# EAGLE board MKRConnectorCarrier_V3.0 (EAGLE 9.1.3)
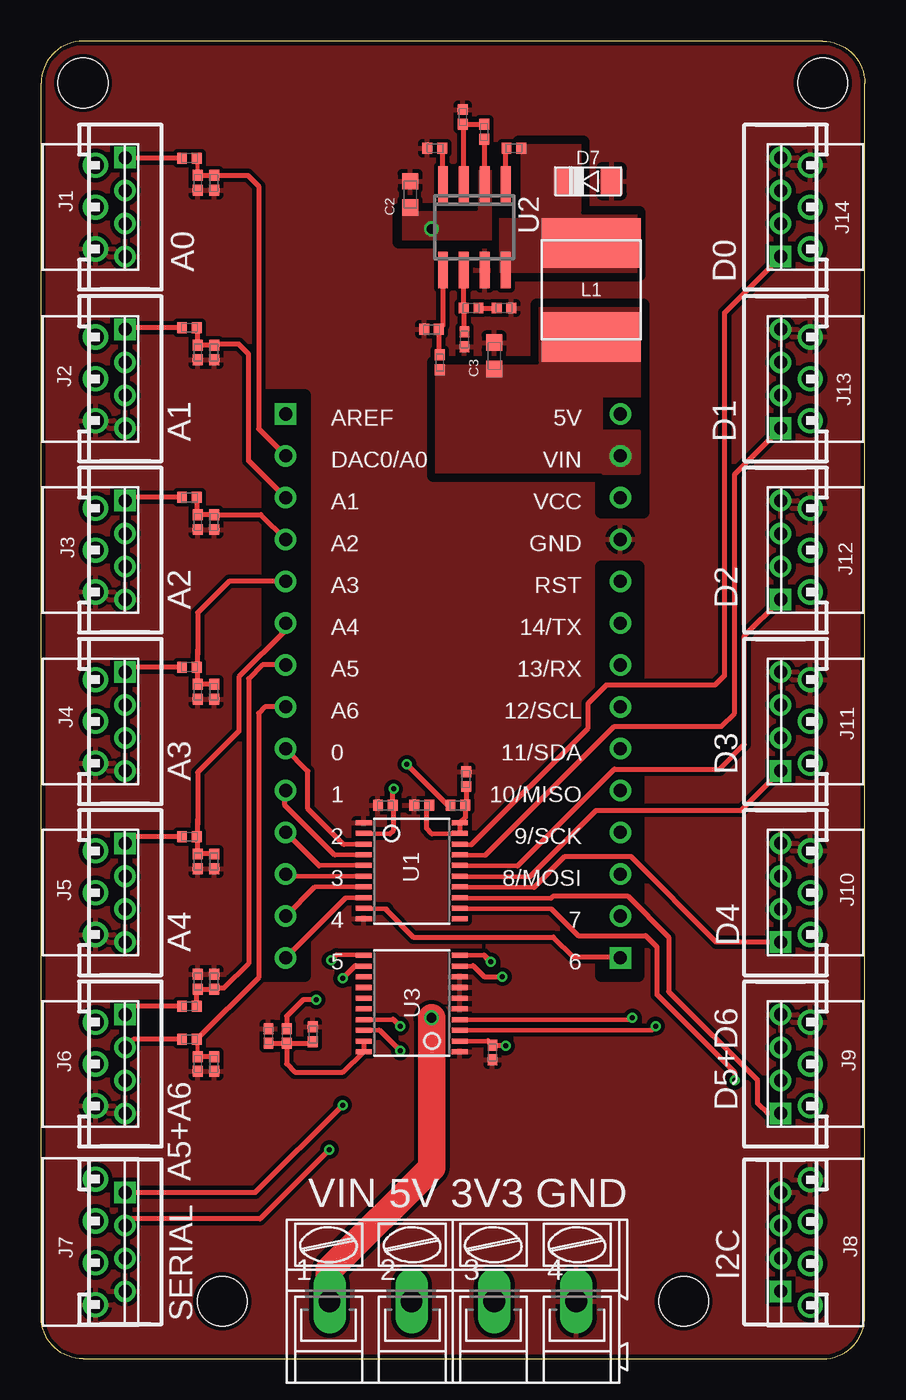
[diagram p0: board, top side]
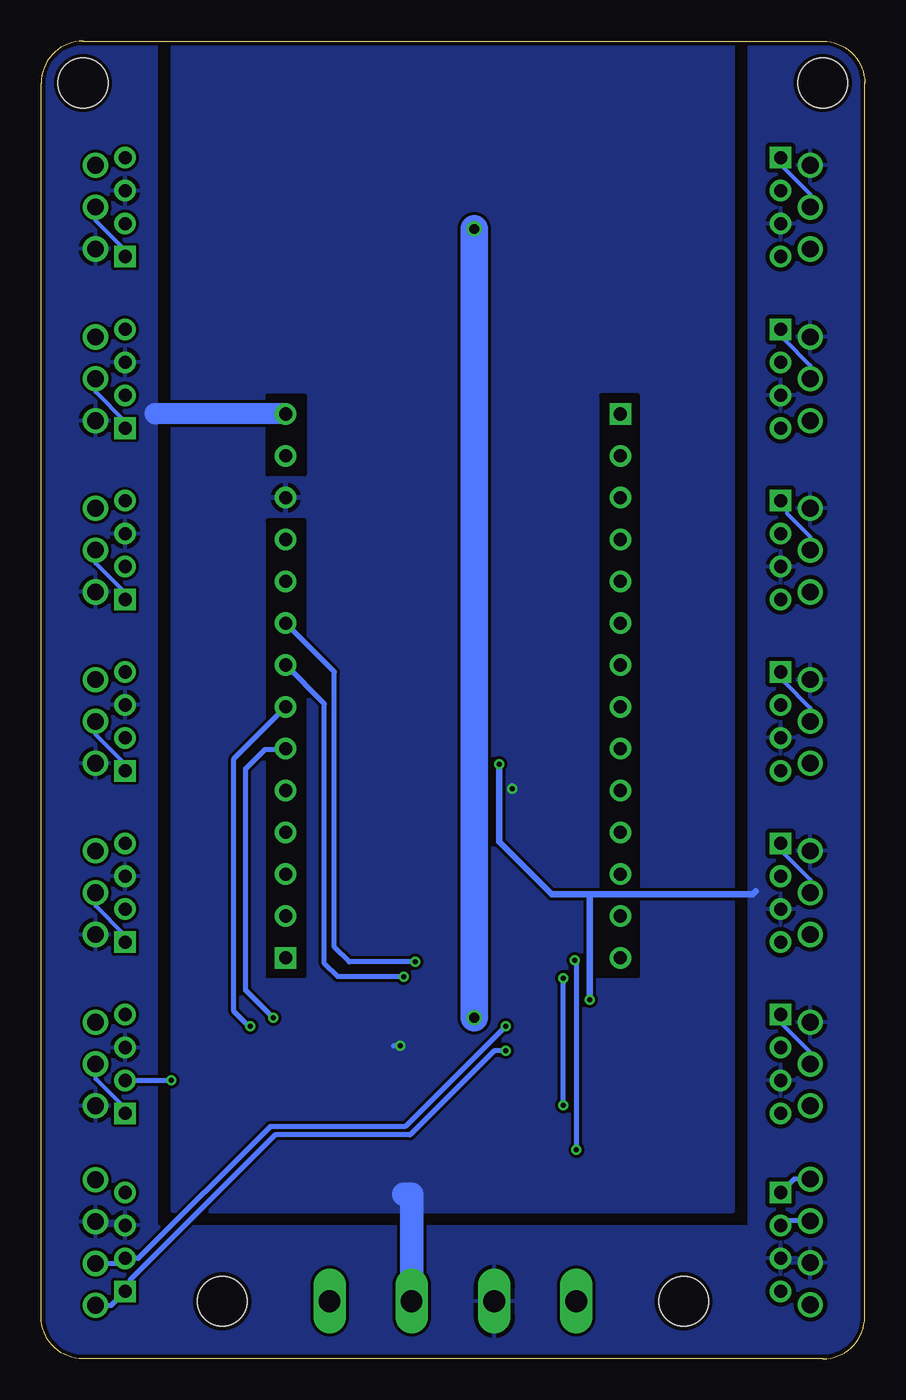
[diagram p1: board, bottom side, seen from below]

Size 50 x 80 mm. Coordinates in mm from the lower left corner, seen from the top.
Outline: 2.54,0 47.46,0 arc90 50,2.54 50,77.46 arc90 47.46,80 2.54,80 arc90 0,77.46 0,2.54 arc90 2.54,0
Copper layers (1*16): Top 0.035mm / dielectric 1.5mm / Bottom 0.035mm
Design rules "SeeedStudio_2layers *": minimum track width 6mil, minimum drill 12mil, track to track 7mil, track to pad 7mil, pad to pad 7mil, via to via 7mil, smd to smd 0mil, copper to edge 10mil, drill to drill 10mil, minimum pad ring 10mil, minimum via ring 6mil, stop-mask expansion 2mil, vias tented up to drill 100mil, thermal gap 10mil
Holes 3 mm at 47.46,77.46 2.54,77.46 11,3.5 39,3.5
tRestrict: 30 lines
bRestrict: 12 lines

## Footprints (pad centres in the part's own frame; a part is rotated, then mirrored left to right if it is on the bottom)
MODULINO-3SM = drill 1.016: 1 2.54,0; 2 0,0; 3 -2.54,0
MKRBOARD-NOOUTLINE = drill 0.8: 0 42.455,2.34; 1 44.995,2.34; 2 47.535,2.34; 3 50.075,2.34; 4 52.615,2.34; 5 55.155,2.34; 5V 22.135,22.66; 7 52.615,22.66; 8 50.075,22.66; 9 47.535,22.66; 10 44.995,22.66; 11 42.455,22.66; 12 39.915,22.66; 13 37.375,22.66; 14 34.835,22.66; A0 24.675,2.34; A1 27.215,2.34; A2 29.755,2.34; A3 32.295,2.34; A4 34.835,2.34; A5 37.375,2.34; A6 39.915,2.34; GND 29.755,22.66; RST 32.295,22.66; VCC 27.215,22.66; VIN 24.675,22.66 | drill 0.8 square: 6 55.155,22.66; AREF 22.135,2.34
0402-1005X55N = smd 0.62 x 0.62: 1 -0.45,0; 2 0.45,0
0603-1608X90N = smd 0.95 x 1: 1 -0.8,0; 2 0.8,0
SOD123F = smd 1.8 x 1.34: A 0,-1.43; C 0,1.43
MODULINO-4SM = drill 1.016: 1 5.08,0; 2 2.54,0; 3 0,0; 4 -2.54,0
HW4-2.0 = drill 0.8 pad 1.27 square: 1 -3,0 | drill 0.8 pad 1.27: 2 -1,0; 3 1,0; 4 3,0
SRN6045 = smd 3 x 6: 1 -2.85,0; 2 2.85,0
AK300/4 = drill 1.321 long: 1 -7.493,0; 2 -2.515,0; 3 2.515,0; 4 7.493,0
TSSOP20 = smd 0.305 x 0.991: 1 -2.955,-2.918; 2 -2.305,-2.918; 3 -1.655,-2.918; 4 -1.005,-2.918; 5 -0.355,-2.918; 6 0.295,-2.918; 7 0.945,-2.918; 8 1.595,-2.918; 9 2.245,-2.918; 10 2.895,-2.918; 11 2.895,2.918; 12 2.245,2.918; 13 1.595,2.918; 14 0.945,2.918; 15 0.295,2.918; 16 -0.355,2.918; 17 -1.005,2.918; 18 -1.655,2.918; 19 -2.305,2.918; 20 -2.955,2.918
SO08 = smd 0.6 x 2.2: 1 -1.905,-2.6; 2 -0.635,-2.6; 3 0.635,-2.6; 4 1.905,-2.6; 5 1.905,2.6; 6 0.635,2.6; 7 -0.635,2.6; 8 -1.905,2.6

## Placement (x,y rotation side)
A0  DNP  [MODULINO-3SM]  3.3,69.92 90 top
A1  DNP  [MODULINO-3SM]  3.3,59.5 90 top
A2  DNP  [MODULINO-3SM]  3.3,49.1 90 top
A3  DNP  [MODULINO-3SM]  3.3,38.7 90 top
A4  DNP  [MODULINO-3SM]  3.3,28.3 90 top
A5  DNP  [MODULINO-3SM]  3.3,17.9 90 top
B1  DNP  [MKRBOARD-NOOUTLINE]  12.5,79.5 270 top
C1  100n  [0402-1005X55N]  28.7,73.5 0 top
C2  10u  [0603-1608X90N]  22.4,70.7 90 top
C3  10u  [0603-1608X90N]  27.5,60.9 90 top
C4  8n2  [0402-1005X55N]  23.9,73.5 180 top
C5  4n7  [0402-1005X55N]  28.1,63.8 0 top
C6  110p  [0402-1005X55N]  25.7,61.9 270 top
C7  100n  [0402-1005X55N]  20.9,33.6 0 top
C8  DNP  [0402-1005X55N]  23.1,33.6 180 top
C9  100n  [0402-1005X55N]  25.8,35.2 270 top
C10  100n  [0402-1005X55N]  10.5,71.4 270 top
C11  100n  [0402-1005X55N]  10.5,61.1 270 top
C12  100n  [0402-1005X55N]  10.5,50.8 270 top
C13  100n  [0402-1005X55N]  10.5,40.5 270 top
C14  100n  [0402-1005X55N]  10.5,30.2 270 top
C15  100n  [0402-1005X55N]  10.5,22.9 90 top
C16  100n  [0402-1005X55N]  10.5,17.9 270 top
C17  100n  [0402-1005X55N]  27.4,18.6 90 top
C18  DNP  [0402-1005X55N]  16.5,19.7 90 top
C19  100n  [0402-1005X55N]  13.8,19.6 270 top
D0  DNP  [MODULINO-3SM]  46.7,69.92 270 top
D1  DNP  [MODULINO-3SM]  46.7,59.5 270 top
D2  DNP  [MODULINO-3SM]  46.7,49.1 270 top
D3  DNP  [MODULINO-3SM]  46.7,38.7 270 top
D4  DNP  [MODULINO-3SM]  46.7,28.3 270 top
D5  DNP  [MODULINO-3SM]  46.7,17.9 270 top
D7  SS24FL  [SOD123F]  33.2,71.5 90 top
FRAME1  DNP  [FRAME]  -0.6,-7.6 0 top  (outside the outline)
I2C  DNP  [MODULINO-4SM]  46.7,8.33 270 top
J1  -  [HW4-2.0]  5.1,69.92 270 top
J2  -  [HW4-2.0]  5.1,59.5 270 top
J3  -  [HW4-2.0]  5.1,49.1 270 top
J4  -  [HW4-2.0]  5.1,38.7 270 top
J5  -  [HW4-2.0]  5.1,28.3 270 top
J6  -  [HW4-2.0]  5.1,17.9 270 top
J7  -  [HW4-2.0]  5.1,7.1 270 top
J8  -  [HW4-2.0]  44.9,7.1 90 top
J9  -  [HW4-2.0]  44.9,17.9 90 top
J10  -  [HW4-2.0]  44.9,28.3 90 top
J11  -  [HW4-2.0]  44.9,38.7 90 top
J12  -  [HW4-2.0]  44.9,49.1 90 top
J13  -  [HW4-2.0]  44.9,59.5 90 top
J14  -  [HW4-2.0]  44.9,69.92 90 top
L1  15uH  [SRN6045]  33.4,64.9 270 top
R1  DNP  [0402-1005X55N]  25.6,75.4 270 top
R2  DNP  [0402-1005X55N]  26.9,74.5 90 top
R3  10k2  [0402-1005X55N]  24.2,60.5 270 top
R4  1k91  [0402-1005X55N]  23.7,62.5 0 top
R5  12k7  [0402-1005X55N]  26.1,63.8 180 top
R6  100k  [0402-1005X55N]  25.3,33.6 180 top
R7  470k  [0402-1005X55N]  9,72.9 0 top
R8  910k  [0402-1005X55N]  9.5,71.4 90 top
R9  470k  [0402-1005X55N]  9,62.6 0 top
R10  910k  [0402-1005X55N]  9.5,61.1 90 top
R11  470k  [0402-1005X55N]  9,52.3 0 top
R12  910k  [0402-1005X55N]  9.5,50.8 90 top
R13  470k  [0402-1005X55N]  9,42 0 top
R14  910k  [0402-1005X55N]  9.5,40.5 90 top
R15  470k  [0402-1005X55N]  9,31.7 0 top
R16  910k  [0402-1005X55N]  9.5,30.2 90 top
R17  470k  [0402-1005X55N]  9,21.4 0 top
R18  910k  [0402-1005X55N]  9.5,22.9 270 top
R19  470k  [0402-1005X55N]  9,19.4 0 top
R20  910k  [0402-1005X55N]  9.5,17.9 90 top
R21  100k  [0402-1005X55N]  14.9,19.6 90 top
SERIAL  DNP  [MODULINO-4SM]  3.3,5.83 90 top
SUPPLY  -  [AK300/4]  25,3.5 0 top
U1  LSF0108  [TSSOP20]  22.5,29.6 270 top
U2  TPS54232DR  [SO08]  26.3,68.7 180 top
U3  LSF0108  [TSSOP20]  22.5,21.6 90 top

## Library data of the parts
A0 A1-A5 D0 D1-D5 I2C SERIAL = Arduino-connectors; DATASHEET: DNP; DISTRIBUTOR-LINK: DNP; DISTRIBUTOR-PN: DNP; MANUFACTURER: DNP; MANUFACTURER-PN: DNP
B1 FRAME1 = Arduino-utility; CODE-ARDUINO: DNP; DATASHEET: DNP; DISTRIBUTOR-LINK: DNP; DISTRIBUTOR-PN: DNP; MANUFACTURER: DNP; MANUFACTURER-PN: DNP
C1 C7 C9-C17 C19 = Arduino-rcl; CODE-ARDUINO: 0132; DATASHEET: http://www.tdk.com/pdf/TDKMLCCCapRange.pdf; DISTRIBUTOR-LINK: http://www.digikey.com/product-detail/en/tdk-corporation/C1005X5R1H104K050BB/445-5942-1-ND/2443982; DISTRIBUTOR-PN: 445-5942-1-ND; MANUFACTURER: TDK; MANUFACTURER-PN: C1005X5R1H104K050BB
C2 C3 = Arduino-rcl; CODE-ARDUINO: 2213; DATASHEET: http://www.murata.com/~/media/webrenewal/support/library/catalog/products/capacitor/mlcc/c02e.pdf; DISTRIBUTOR-LINK: http://www.digikey.com/product-search/en?keywords=490-10728-1-ND; DISTRIBUTOR-PN: 490-10728-1-ND; MANUFACTURER: Murata; MANUFACTURER-PN: GRM188R61C106KAALD
C4 = Arduino-rcl; CODE-ARDUINO: 2263; DATASHEET: http://www.yageo.com/documents/recent/UPY-GPHC_X7R_6.3V-to-50V_18.pdf; DISTRIBUTOR-LINK: https://www.digikey.com/product-detail/en/yageo/CC0402KRX7R7BB822/311-1041-1-ND/302958; DISTRIBUTOR-PN: 311-1041-1-ND; MANUFACTURER: Yageo; MANUFACTURER-PN: CC0402KRX7R7BB822
C5 = Arduino-rcl; CODE-ARDUINO: 2266; DATASHEET: http://search.murata.co.jp/Ceramy/image/img/A01X/partnumbering_e_01.pdf; DISTRIBUTOR-LINK: https://www.digikey.com/product-detail/en/murata-electronics-north-america/GRM155R71H472KA01J/490-8259-1-ND/4380553; DISTRIBUTOR-PN: 490-8259-1-ND; MANUFACTURER: Murata; MANUFACTURER-PN: GRM155R71H472KA01J
C6 = Arduino-rcl; CODE-ARDUINO: 2264; DATASHEET: http://search.murata.co.jp/Ceramy/image/img/A01X/G101/ENG/GRM1555C1H111GA01-01.pdf; DISTRIBUTOR-LINK: https://www.digikey.com/product-detail/en/murata-electronics-north-america/GRM1555C1H111GA01D/490-6195-1-ND/3845392; DISTRIBUTOR-PN: 490-6195-1-ND; MANUFACTURER: Murata; MANUFACTURER-PN: GRM1555C1H111GA01D
C8 C18 = Arduino-rcl; CODE-ARDUINO: DNP; DATASHEET: DNP; DISTRIBUTOR-LINK: DNP; DISTRIBUTOR-PN: DNP; MANUFACTURER: DNP; MANUFACTURER-PN: DNP
D7 = Arduino-diodes; CODE-ARDUINO: 2262; DATASHEET: https://www.fairchildsemi.com/datasheets/SS/SS24FL.pdf; DISTRIBUTOR-LINK: https://www.digikey.com/product-detail/en/fairchild-on-semiconductor/SS24FL/SS24FLCT-ND/5305093; DISTRIBUTOR-PN: SS24FLCT-ND; MANUFACTURER: Fairchild; MANUFACTURER-PN: SS24FL
J1-J14 = Arduino-connectors; CODE-ARDUINO: 2340; DATASHEET: http://www.jst-mfg.com/product/pdf/eng/ePH.pdf; DISTRIBUTOR-LINK: https://www.digikey.com/product-detail/en/jst-sales-america-inc/B4B-PH-K-S(LF)(SN)/455-1706-ND/926613; DISTRIBUTOR-PN: 455-1706-ND; MANUFACTURER: JST; MANUFACTURER-PN: B4B-PH-K-S(LF)(SN)
L1 = Arduino-rcl; CODE-ARDUINO: 2261; DATASHEET: http://pdf1.alldatasheet.com/datasheet-pdf/view/442254/BOURNS/SRN6045-150M.html; DISTRIBUTOR-LINK: https://www.digikey.com/product-detail/en/bourns-inc/SRN6045-150M/SRN6045-150MCT-ND/2756165; DISTRIBUTOR-PN: SRN6045-150M; MANUFACTURER: Bourns; MANUFACTURER-PN: SRN6045-150M
R1 R2 = Arduino-rcl; CODE-ARDUINO: DNP; DATASHEET: DNP; DISTRIBUTOR-LINK: DNP; DISTRIBUTOR-PN: DNP; MANUFACTURER: DNP; MANUFACTURER-PN: DNP; _RESTRICTIONS: NO
R3 = Arduino-rcl; CODE-ARDUINO: 2265; DATASHEET: www.yageo.com.tw/exep/pages/download/literatures/PYu-R_INT-thick_7.pdf; DISTRIBUTOR-LINK: https://www.digikey.com/product-detail/en/yageo/RT0402DRD0710K2L/311-2129-1-ND/6128548; DISTRIBUTOR-PN: 311-2129-1-ND; MANUFACTURER: Yageo; MANUFACTURER-PN: RT0402DRD0710K2L; _RESTRICTIONS: NO
R4 = Arduino-rcl; CODE-ARDUINO: 2267; DATASHEET: www.yageo.com.tw/exep/pages/download/literatures/PYu-R_INT-thick_7.pdf; DISTRIBUTOR-LINK: https://www.digikey.com/product-detail/en/yageo/RC0402FR-071K91L/YAG3049CT-ND/5281914; DISTRIBUTOR-PN: YAG3049CT-ND; MANUFACTURER: Yageo; MANUFACTURER-PN: RC0402FR-071K91L; _RESTRICTIONS: NO
R5 = Arduino-rcl; CODE-ARDUINO: 2260; DATASHEET: www.yageo.com.tw/exep/pages/download/literatures/PYu-R_INT-thick_7.pdf; DISTRIBUTOR-LINK: https://www.digikey.com/product-detail/en/yageo/RC0402FR-0712K7L/YAG2964CT-ND/5281829; DISTRIBUTOR-PN: YAG2964CT-ND; MANUFACTURER: Yageo; MANUFACTURER-PN: RC0402FR-0712K7L; _RESTRICTIONS: NO
R6 R21 = Arduino-rcl; CODE-ARDUINO: 0134; DATASHEET: www.yageo.com.tw/exep/pages/download/literatures/PYu-R_INT-thick_7.pdf; DISTRIBUTOR-LINK: http://www.digikey.com/product-detail/en/yageo/RC0402FR-07100KL/311-100KLRCT-ND/729473; DISTRIBUTOR-PN: 311-100KLRCT-ND; MANUFACTURER: Yageo; MANUFACTURER-PN: RC0402FR-07100KL; _RESTRICTIONS: NO
R7 R9 R11 R13 R15 R17 R19 = Arduino-rcl; CODE-ARDUINO: -; DATASHEET: www.yageo.com.tw/exep/pages/download/literatures/PYu-R_INT-thick_7.pdf; DISTRIBUTOR-LINK: https://www.digikey.com/product-detail/en/yageo/RC0402JR-07470KL/311-470KJRCT-ND/729430; DISTRIBUTOR-PN: 311-470KJRCT-ND; MANUFACTURER: Yageo; MANUFACTURER-PN: RC0402JR-07470KL; _RESTRICTIONS: NO
R8 R10 R12 R14 R16 R18 R20 = Arduino-rcl; CODE-ARDUINO: -; DATASHEET: www.yageo.com.tw/exep/pages/download/literatures/PYu-R_INT-thick_7.pdf; DISTRIBUTOR-LINK: https://www.digikey.com/product-detail/en/yageo/RC0402FR-07910KL/YAG3257CT-ND/5282123; DISTRIBUTOR-PN: YAG3257CT-ND; MANUFACTURER: Yageo; MANUFACTURER-PN: RC0402FR-07910KL; _RESTRICTIONS: NO
SUPPLY = Arduino-connectors; CODE-ARDUINO: 2342; DATASHEET: http://www.on-shore.com/wp-content/uploads/2015/09/osttcxx0162.pdf; DISTRIBUTOR-LINK: https://www.digikey.com/product-detail/en/on-shore-technology-inc/OSTTC040162/ED2602-ND/614551; DISTRIBUTOR-PN: ED2602-ND; MANUFACTURER: On Shore; MANUFACTURER-PN: OSTTC040162
U1 U3 = Arduino-ICs; CODE-ARDUINO: 2204; DATASHEET: http://www.ti.com/lit/ds/symlink/lsf0108.pdf; DISTRIBUTOR-LINK: https://www.digikey.com/product-detail/en/texas-instruments/LSF0108PWR/296-37828-1-ND/4876357; DISTRIBUTOR-PN: 296-37828-1-ND; MANUFACTURER: Texas Instruments; MANUFACTURER-PN: LSF0108PWR
U2 = Arduino-ICs; CODE-ARDUINO: 2269; DATASHEET: http://www.ti.com/lit/ds/symlink/tps54232.pdf; DISTRIBUTOR-LINK: https://www.digikey.com/product-detail/en/texas-instruments/TPS54232DR/296-39414-1-ND/5143365; DISTRIBUTOR-PN: 296-39414-1-ND; MANUFACTURER: Texas Instruments; MANUFACTURER-PN: TPS54232DR

## Nets
+3V3: B1.VCC C7.2 C17.2 SUPPLY.3 U1.2 U3.2
+5V: A0.1 A1.1 A2.1 A3.1 A4.1 A5.1 B1.5V D0.1 D1.1 D2.1 D3.1 D4.1 D5.1 I2C.3 J1.3 J2.3 J3.3 J4.3 J5.3 J6.3 J7.3 J8.3 J9.3 J10.3 J11.3 J12.3 J13.3 J14.3 R6.2 R21.2 SERIAL.3 SUPPLY.2
A0: B1.A0 C10.1 R7.2 R8.2
A1: B1.A1 C11.1 R9.2 R10.2
A2: B1.A2 C12.1 R11.2 R12.2
A3: B1.A3 C13.1 R13.2 R14.2
A4: B1.A4 C14.1 R15.2 R16.2
A5: B1.A5 C15.1 R17.2 R18.2
A6: B1.A6 C16.1 R19.2 R20.2
AN0: A0.2 J1.1 R7.1
AN1: A1.2 J2.1 R9.1
AN2: A2.2 J3.1 R11.1
AN3: A3.2 J4.1 R13.1
AN4: A4.2 J5.1 R15.1
AN5: A5.2 J6.1 R17.1
AN6: J6.2 R19.1
D0: B1.0 U1.3
D1: B1.1 U1.4
D2: B1.2 U1.5
D3: B1.3 U1.6
D4: B1.4 U1.7
D5: B1.5 U1.8
D6: B1.6 U1.9
GND: A0.3 A1.3 A2.3 A3.3 A4.3 A5.3 B1.GND C2.2 C3.2 C4.2 C5.2 C6.2 C7.1 C8.2 C9.1 C10.2 C11.2 C12.2 C13.2 C14.2 C15.2 C16.2 C17.1 C18.2 C19.1 D0.3 D1.3 D2.3 D3.3 D4.3 D5.3 D7.A I2C.4 J1.4 J2.4 J3.4 J4.4 J5.4 J6.4 J7.4 J8.4 J9.4 J10.4 J11.4 J12.4 J13.4 J14.4 R1.1 R4.1 R8.1 R10.1 R12.1 R14.1 R16.1 R18.1 R20.1 SERIAL.4 SUPPLY.4 U1.1 U1.10 U2.7 U3.1 U3.5 U3.6 U3.7 U3.8
I/O0: D0.2 J14.1 U1.18
I/O1: D1.2 J13.1 U1.17
I/O2: D2.2 J12.1 U1.16
I/O3: D3.2 J11.1 U1.15
I/O4: D4.2 J10.1 U1.14
I/O5: D5.2 J9.1 U1.13
I/O6: J9.2 U1.12
N$1: C2.1 R2.1 SUPPLY.1 U2.2
N$2: R1.2 R2.2 U2.3
N$3: C1.1 U2.1
N$4: C1.2 D7.C L1.1 U2.8
N$5: C4.1 U2.4
N$6: R3.1 R4.2 U2.5
N$7: C6.1 R5.2 U2.6
N$8: C5.1 R5.1
N$9: C8.1 C9.2 R6.1 U1.19 U1.20
N$10: C18.1 C19.2 R21.1 U3.19 U3.20
RX: B1.13 U3.9
RX5: J7.1 SERIAL.1 U3.12
SCL: B1.12 U3.3
SCL5: I2C.1 J8.1 U3.18
SDA: B1.11 U3.4
SDA5: I2C.2 J8.2 U3.17
TX: B1.14 U3.10
TX5: J7.2 SERIAL.2 U3.11
VIN: B1.VIN C3.1 L1.2 R3.2

## Tracks (layer width: path | path; a pad name or v marks a point on that pad's centre or on a via)
+3V3  (via drill 0.3)
  Top 0.305: U1.2 21.18,31.88 21.4,32.1 21.4,33.55 C7.2 21.35,34.55 v21.4,34.6 | 27.23,19.23 C17.2 | C17.2 28.15,19.05 v28.2,19 | U3.2 27.12,19.32 C17.2
  Bottom 0.305: v21.4,34.6 21.4,34.8 | v28.2,19 28.6,19
  Bottom 1.422: SUPPLY.3 27.52,9.98 28,10
  pour Bottom: 8,81 42,80 42,9 8,9
+5V  (via drill 0.3)
  Top 0.305: v22.2,36.1 24.7,33.6 R6.2 | v16.7,21.8 15.9,21.8 14.9,20.8 R21.2
  Bottom 0.406: v22.2,36.1 22.2,31.4 19,28.2 16.7,28.2 | 16.7,28.2 6.8,28.2 6.6,28.4 | v16.7,21.8 16.7,28.2
  Bottom 1.27: B1.5V 43.06,57.37 43.1,57.4
  pour Bottom: 43,80 50,80 50,0 7,0 7,8 43,8
  pour Bottom (isolate 0.254): 0,80 7,80 7,0 -1,0
A0
  Top 0.254: R8.2 9.5,72.85 R7.2
  Top 0.305: R8.2 C10.1 12.55,71.85 13.2,71.2 13.2,56.47 B1.A0
A1
  Top 0.305: B1.A1 12.6,54.52 12.6,61 12,61.6 10.55,61.6 C11.1 R10.2 9.5,62.55 R9.2
A2
  Top 0.305: 14.74,49.74 B1.A2 13.34,51.25 C12.1 R12.2 9.45,51.3 R11.2
A3
  Top 0.305: C13.1 R14.2 9.5,42.95 R13.2 9.5,43.05 9.5,45.3 11.4,47.2 B1.A3
A4
  Top 0.305: C14.1 R16.2 9.5,32.65 R15.2 9.5,32.75 9.5,35.6 12,38.1 12,41.4 14.84,44.24 B1.A4
A5
  Top 0.305: B1.A5 13.43,42.12 12.6,41.3 12.6,24 11.1,22.5 10.55,22.5 C15.1 R18.2 9.45,22.4 R17.2
A6
  Top 0.254: R20.2 9.5,19.35 R19.2
  Top 0.305: C16.1 R20.2 | B1.A6 13.59,39.59 13.2,39.2 13.2,23.15 R19.2
AN0
  Top 0.305: R7.1 5.12,72.9 J1.1
  Bottom 0.254: A0.2 3.3,70.7 5,72.4 5,72.83 J1.1
AN1
  Top 0.305: R9.1 5.2,62.6 J2.1
  Bottom 0.254: A1.2 3.3,60.3 4.9,61.9 4.9,62.3 J2.1
AN2
  Top 0.305: R11.1 5.3,52.3 J3.1
  Bottom 0.254: A2.2 3.3,49.9 4.7,51.3 4.7,51.7 J3.1
AN3
  Top 0.305: R13.1 5.4,42 J4.1
  Bottom 0.254: A3.2 3.3,39.5 4.9,41.1 4.9,41.5 J4.1
AN4
  Top 0.305: R15.1 5.5,31.7 J5.1
  Bottom 0.254: A4.2 3.3,29.1 5,30.8 5,31.2 J5.1
AN5
  Top 0.305: R17.1 5.6,21.4 J6.1
  Bottom 0.254: A5.2 3.3,18.6 5.1,20.4 J6.1
AN6
  Top 0.305: R19.1 5.6,19.4 J6.2
D0
  Top 0.305: U1.3 18.38,31.23 16.2,33.4 16.2,35.69 B1.0
D1
  Top 0.305: U1.4 17.82,30.57 14.8,33.6 14.8,34.47 B1.1
D2
  Top 0.305: U1.5 16.88,29.93 B1.2
D3
  Top 0.305: U1.6 14.99,29.27 B1.3
D4
  Top 0.305: U1.7 16.58,28.62 B1.4
D5
  Top 0.305: U1.8 18.47,27.98 B1.5
D6
  Top 0.305: 35.12,24.3 B1.6 35.1,24.4 32.3,24.4 31.1,25.6 22.6,25.6 20.98,27.23 20.98,27.32 U1.9
GND
  pour Top (isolate 0.254): 0,80.01 50.16,80.01 50.16,0 0,0
I/O0
  Top 0.305: U1.18 26.12,31.23 33.2,38.3 33.2,39.8 34.3,40.9 40.9,40.9 41.5,41.5 41.5,63.52 J14.1
  Bottom 0.254: J14.1 44.9,67.3 46.7,69.1 D0.2
I/O1
  Top 0.305: U1.17 26.98,30.57 34.8,38.4 41.3,38.4 42.1,39.2 42.1,53.7 J13.1
  Bottom 0.254: J13.1 44.9,56.9 46.7,58.7 D1.2
I/O2
  Top 0.305: U1.16 28.93,29.93 34.8,35.8 41.2,35.8 42.7,37.3 42.7,43.9 J12.1
  Bottom 0.254: J12.1 44.9,46.5 46.7,48.3 D2.2
I/O3
  Top 0.305: U1.15 29.68,29.27 33.7,33.3 42.5,33.3 J11.1
  Bottom 0.254: J11.1 44.9,36.1 46.7,37.9 D3.2
I/O4
  Top 0.305: U1.14 29.93,28.62 31.8,30.5 35.8,30.5 41,25.3 J10.1
  Bottom 0.254: J10.1 44.9,25.7 46.7,27.5 D4.2
I/O5
  Top 0.305: U1.13 30.98,27.98 31.1,28.1 35.6,28.1 38.1,25.6 38.1,22.3 43.5,16.9 43.5,15.5 44.1,14.9 J9.1
  Bottom 0.254: D5.2 46.7,17 44.9,15.2 J9.1
I/O6  (via drill 0.3)
  Top 0.305: U1.12 30.98,27.32 32.6,25.7 36.7,25.7 37.4,25 37.4,22.1 42.1,17.4 v42.1,16.9
  Bottom 0.305: J9.2 v42.1,16.9
N$1  (via drill 0.6)
  Top 0.305: U2.2 26.93,74.02 R2.1
  Top 1.676: v23.7,20.7 23.7,11.6 17.5,5.4 SUPPLY.1
  Bottom 1.676: v23.7,20.7 v23.7,68.6
  pour Top (no thermals): 22,69.8 22,67.9 27.5,67.9 27.5,72.3 26.4,72.3 26.4,69.8
N$2
  Top 0.305: U2.3 25.66,74.89 R1.2 R2.2
N$3
  Top 0.305: U2.1 28.2,73.45 C1.1
N$4
  pour Top (no thermals): 29,73.9 32.9,73.9 32.9,69.6 36.3,69.6 36.3,65.8 27.7,65.8 27.7,69.4 29,69.4
N$5
  Top 0.305: U2.4 24.39,73.45 C4.1
N$6
  Top 0.305: U2.5 24.39,62.74 R4.2 24.15,61 R3.1
N$7
  Top 0.305: U2.6 25.65,66.08 R5.2 25.7,63.75 C6.1
N$8
  Top 0.305: R5.1 C5.1
N$9
  Top 0.305: U1.20 25.43,32.52 | C9.2 25.8,33.65 R6.1 25.75,32.86 U1.20 | C8.1 23.4,33.55 23.4,32.2 23.73,31.88 U1.19 U1.20
N$10
  Top 0.305: R21.1 14.9,17.9 15.4,17.4 18.31,17.4 U3.20 U3.19 | C19.2 R21.1 | R21.1 16.5,19.15 C18.1
RX  (via drill 0.3)
  Top 0.305: v28,23.2 26.9,23.2 26.23,23.88 U3.9
  Bottom 0.305: B1.13 32.8,39.77 32.8,24 32,23.2 v28,23.2
RX5  (via drill 0.3)
  Top 0.305: U3.12 19.07,23.88 v18.3,23.1 | J7.1 13,10.1 v18.3,15.4
  Bottom 0.305: SERIAL.1 4.29,10.91 J7.1 | v18.3,15.4 v18.3,23.1
SCL  (via drill 0.3)
  Top 0.305: U3.3 37.08,19.98 v37.3,20.2
  Bottom 0.305: B1.12 38.3,36.45 38.3,21.1 37.4,20.2 v37.3,20.2
SCL5  (via drill 0.3)
  Top 0.305: U3.18 20.52,19.98 v21.8,18.7
  Bottom 0.305: I2C.1 45.75,3.25 J8.1 44.6,4.4 44.6,4.8 35.8,13.6 27.6,13.6 22.5,18.7 v21.8,18.7
SDA  (via drill 0.3)
  Top 0.305: U3.4 35.83,20.62 v35.9,20.7
  Bottom 0.305: B1.11 35.2,37 36.4,37 37.6,35.8 37.6,22.4 v35.9,20.7
SDA5  (via drill 0.3)
  Top 0.305: U3.17 21.38,20.62 v21.8,20.2
  Bottom 0.305: I2C.2 45.21,5.79 J8.2 44.1,6.1 36.1,14.1 27.9,14.1 v21.8,20.2
TX  (via drill 0.3)
  Top 0.305: 26.98,24.43 v27.3,24.1 26.88,24.52 U3.10
  Bottom 0.305: B1.14 32.2,41.7 32.2,25 31.3,24.1 v27.3,24.1
TX5  (via drill 0.3)
  Top 0.305: U3.11 17.93,24.52 v17.6,24.2 | v17.5,12.7 13.3,8.5 5.5,8.5 J7.2
  Bottom 0.305: SERIAL.2 4.83,8.37 J7.2 | v17.6,24.2 17.6,24.1 17.5,24 v17.5,12.7
VIN
  pour Top (no thermals): 30,64 30,60.3 24,60.3 24,53.8 36.3,53.8 36.3,56.3 34,56.3 34,58.5 36.5,58.5 36.5,64

## Text on the board
tPlace: A0 | D0 | A1 | D1 | A2 | D2 | D3 | A3 | A4 | D4 | D5+D6 | A5+A6 | VIN 5V 3V3 GND | I2C | SERIAL